# Altium PCB ch55x.PcbDoc
Units mm, origin at the board's own origin, x right, y up, seen from the top; angles counter-clockwise.
Board outline 57.3 x 19.67 mm, 2 copper layers (Top Layer, Bottom Layer); 10 components, 19 nets, 47 pads, 17 vias.
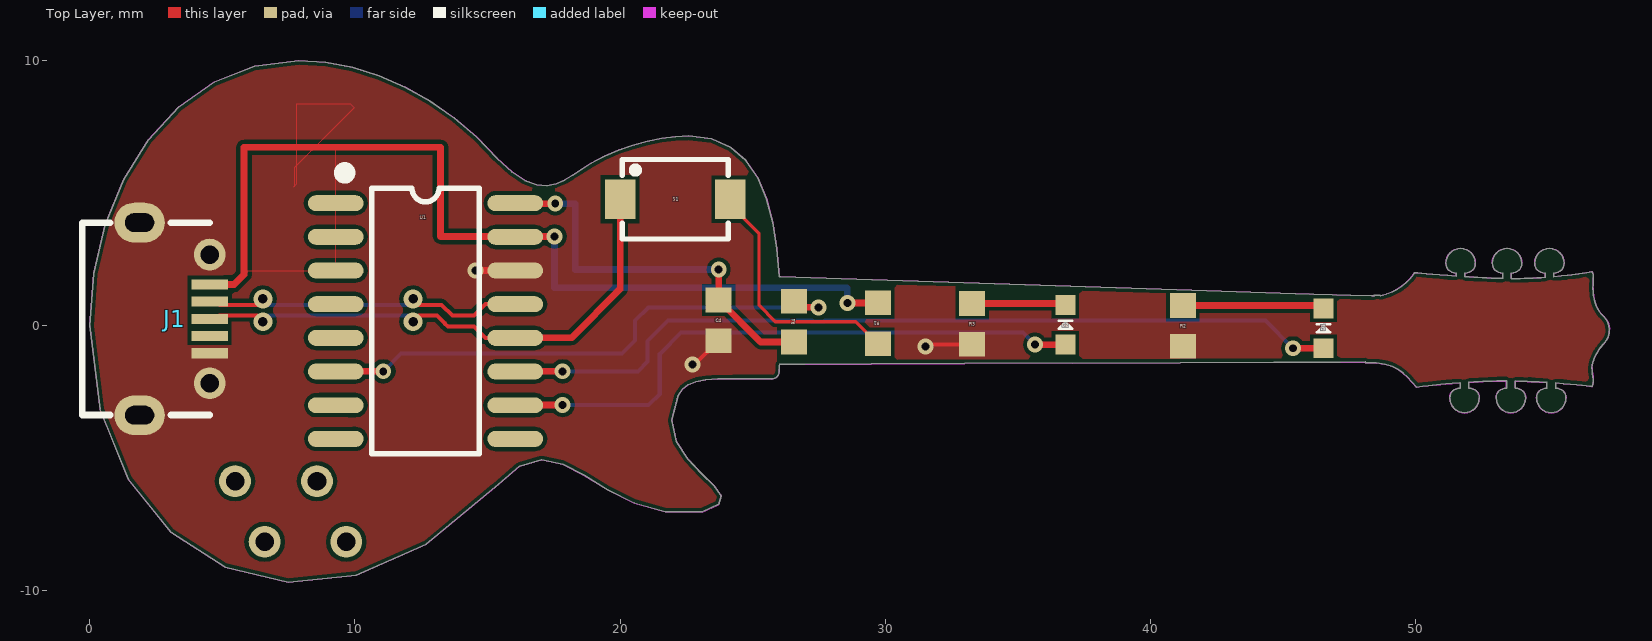
[diagram p0: Top Layer view]
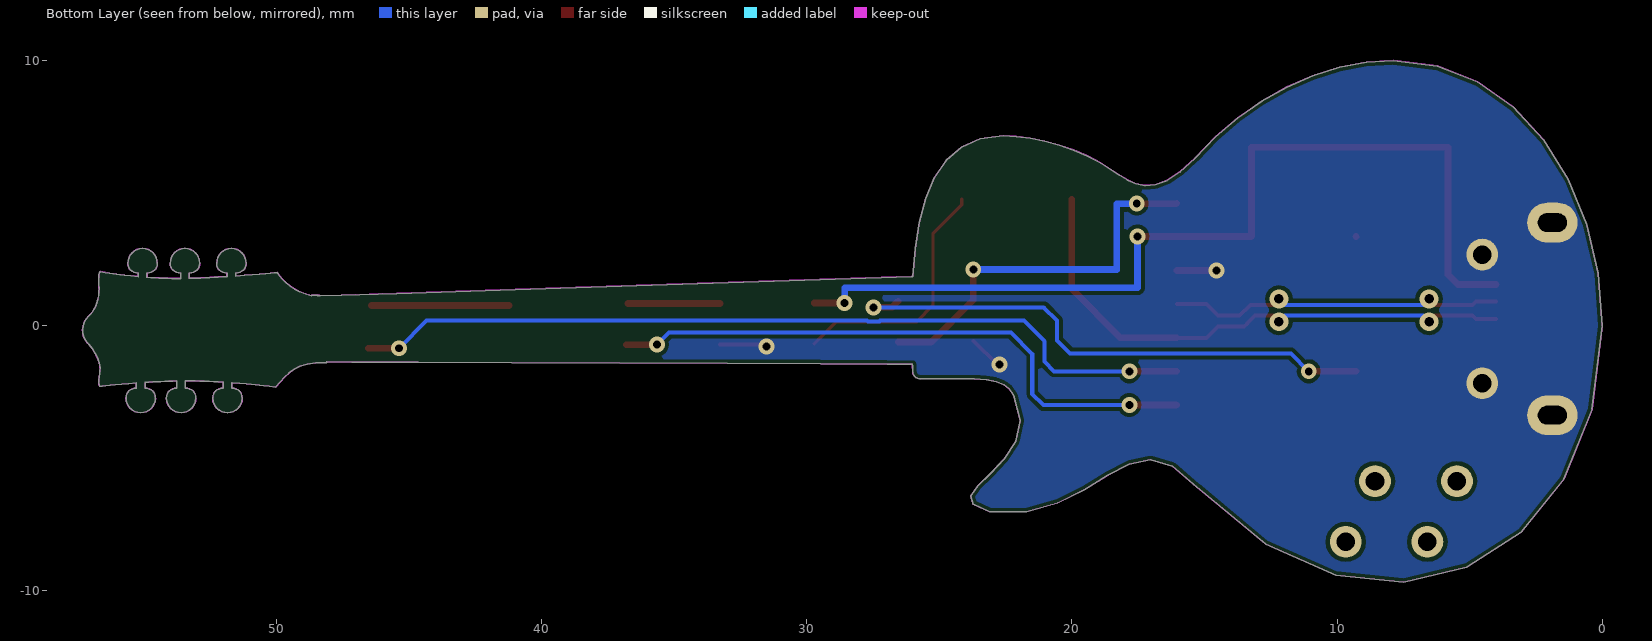
[diagram p1: Bottom Layer view, seen from below]
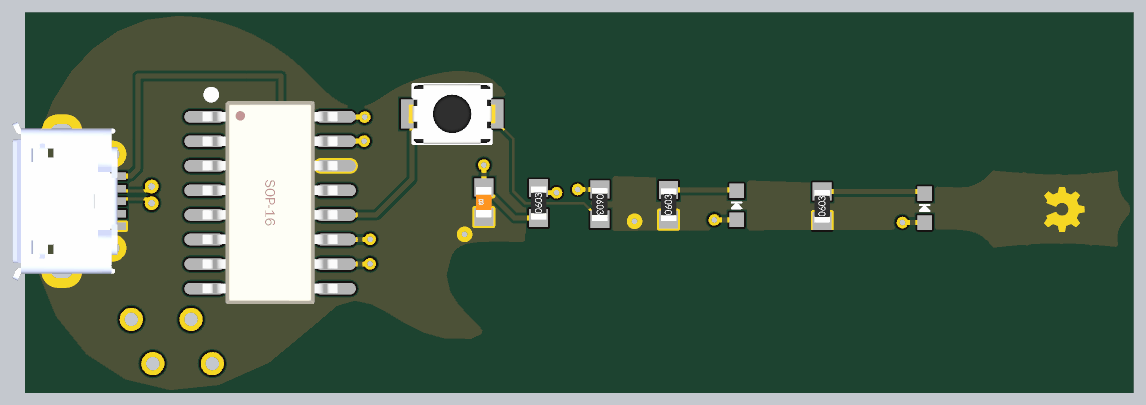
[diagram p2: 3D render of the assembled board from above, using the file's embedded part models]

## Layer stack, top to bottom
Top Solder: solder mask 0.0102, Solder Resist, Dk 3.5
Top Layer: signal copper 0.0356
Dielectric1: dielectric 0.32, FR-4, Dk 4.8
Bottom Layer: signal copper 0.0356
Bottom Solder: solder mask 0.0102, Solder Resist, Dk 3.5

## Board outline
920 vertices, not listed, extent 0.007,-9.676 57.306,9.999

## Design rules (kind name [scope] priority, off if disabled: settings)
Clearance [All] p1: gap=0.152 ignorepadtopadclearanceinfootprint=FALSE except(0: Arc-Hole Track-Hole SMDPad-Hole THPad-Hole Via-Hole Fill-Hole Poly-Hole Region-Hole Text-Hole)
ComponentClearance [All] p1 off: gap=0.254 collisioncheckmode=3 verticalgap=0.254 showdistances=FALSE
DiffPairsRouting [All] p1: maxlimit=0.254 minlimit=0.254 mostfreqgap=0.254 toplayer_minwidth=0.152 toplayer_maxwidth=0.381 toplayer_prefwidth=0.381 bottomlayer_minwidth=0.152 bottomlayer_maxwidth=0.381 bottomlayer_prefwidth=0.381 maxuncoupledlength=12.7
PolygonConnect [All] p1: connectstyle=Direct reliefconductorwidth=0.254 reliefentries=4 polygonreliefangle="90 Angle" airgapwidth=0.254
RoutingVias [All] p1: holewidth=0.356 width=0.711 viastyle="Through Hole" minholewidth=0.356 minwidth=0.711 maxholewidth=0.356 maxwidth=0.711
SolderMaskExpansion [All] p1: expansion=0.102
Width [All] p1: maxlimit=2.54 minlimit=0.127 preferedwidth=0.254 minimp=50.000000 maximp=50.000000 favimp=50.000000
28 further rules are at their usual default settings.

## Classes and differential pairs
differential pair USB: +USB_P -USB_N

## Components (designator, comment, footprint, x,y, rotation, side; value= is the part's Value field where it differs from the comment)
C4 "C0603" 0603_C 23.717,0.199 r90 top value=0.1uF
D1 "GREEN" 0603_LED 46.523,-0.1 r90 top
D2 "RED" 0603_LED 36.792,0.037 r90 top
J1 "Micro USB B" MICRO_USB 3.2,0.258 r90 top
R1 "R0603" 0603_R 29.719,0.09 r270 top value=1K
R2 "R0603" 0603_R 41.222,-0.006 r90 top value=1K
R3 "R0603" 0603_R 33.272,0.07 r90 top value=1K
R4 "R0603" 0603_R 26.551,0.156 r90 top value=100R
S1 "SW-PB" SMT_SW_PTS_820 22.076,4.769 r0 top
U1 "CH551G" SOP16N_M 12.66,0.176 r0 top locked

## Footprints (in the part's own frame and the unit in brackets; to place one, negate y for a bottom-side part, rotate by r counter-clockwise, add the part's x,y. Pads: shape width x height; smd on the part's side, far side on the other; paste and mask are expansions set on the pad)
0603_C [mm]
  rect 0.93x0.98 smd: 1(-0.77,0) 2(0.77,0)
  body extent -0.8,-0.4 0.8,0.4, height 0.3
0603_LED [mm]
  rect 0.75x0.75 smd: 1(-0.75,0) 2(0.75,0)
  silkscreen extent -0.15,-0.25 0.15,0.25
0603_R [mm]
  rect 0.93x0.98 smd: 1(-0.77,0) 2(0.77,0)
  body extent -0.85,-0.4 0.85,0.4, height 0.56
MICRO_USB [mil]
  rect 15x54 smd: 1(51,-52) 2(25.5,-52) 3(0,-52) 4(-25.5,-52) 5(-51,-52)
  oval 59.06x74.8 hole 27.56 slot 43.31 at 90 deg: 6(-143,52) 7(143,52)
  round 47.24 hole 27.5: 8(95.5,-52) 9(-95.5,-52)
  silkscreen extent -143,-52 143,137, body extent -161,-61 161,152, height 105
SMT_SW_PTS_820 [mm] "SMT Tactile ?Switch PTS 820 Series"
  rect 1.143x1.5 smd: 1(-2.075,0) 2(2.075,0)
  round 0 all layers, no hole paste-2.54 mask-2.54: MH1(0,0.9) MH2(0,-0.9)
  silkscreen extent -2,-1.5 2,1.5, body extent -2.25,-1.55 2.25,1.55, height 2.05
SOP16N_M [mm] "10.3*7*1.8mm（长宽高）"
  oval 2.1x0.6 smd: 1(-3.383,4.445) 2(-3.383,3.175) 3(-3.383,1.905) 4(-3.383,0.635) 5(-3.383,-0.635) 6(-3.383,-1.905) 7(-3.383,-3.175) 8(-3.383,-4.445) 9(3.383,-4.445) 10(3.383,-3.175) 11(3.383,-1.905) 12(3.383,-0.635) 13(3.383,0.635) 14(3.383,1.905) 15(3.383,3.175) 16(3.383,4.445)
  silkscreen extent -3.2,-5 2.03,5.74, body extent -3.5,-5.25 3.5,5.25, height 1.9

## Part data
C4: "Capacitor", LatestRevisionDate=17-Jul-2002, LatestRevisionNote="Re-released for DXP Platform.", PackageDescription="Radial Cap, Thru-Hole; 2 Leads; 0.3 in Pin Spacing", PackageReference=RAD-0.3, Published=8-Jun-2000, Publisher="Altium Limited"
D1 D2: library part D0603, "Typical RED, GREEN, YELLOW, AMBER GaAs LED", LatestRevisionDate=17-Jul-2002, LatestRevisionNote="Re-released for DXP Platform.", PackageDescription="SM LED; 2 Flat Leads", PackageReference=3.2X1.6X1.1, PackageVersion=Feb-2002, Published=8-Jun-2000, Publisher="Altium Limited"
R1 R2 R3 R4: "Resistor", LatestRevisionDate=17-Jul-2002, LatestRevisionNote="Re-released for DXP Platform.", PackageDescription="Axial Device, Thru-Hole; 2 Leads; 0.3 in Pin Spacing", PackageReference=AXIAL-0.3, Published=8-Jun-2000, Publisher="Altium Limited"
S1: "Switch", LatestRevisionDate=17-Jul-2002, LatestRevisionNote="Re-released for DXP Platform.", PackageDescription="Switch; 2 Leads", PackageReference=SPST-2, Published=24-Mar-1999, Publisher="Altium Limited"

## Free pads (board coordinates)
  round 1.2 hole 0.699: 2(5.477,-5.861) 2(6.592,-8.15) 2(8.568,-5.861) 2(9.67,-8.15)

## Via types
v1: diameter 0.6, hole 0.3, Top Layer to Bottom Layer, 13 vias
v2: diameter 0.711, hole 0.356, Top Layer to Bottom Layer, 4 vias

## Nets (pads, with @x,y where several pads share a name; then routed paths per layer and width w, separated by ;. In a path a pad name is that pad's centre, name@x,y a point inside that pad or via, vN(x,y) a via of type N, cw(c..) or ccw(c..) an arc to the next point about the centre after c; other vN are vias at no path point)
3V3: C4.2 R4.1 U1.16 | length 14.8
  Top Layer w0.254: U1.16 16.061,4.604 v1(17.552,4.604) ; v1(23.717,2.119) C4.2 25.3,-0.614 R4.1
  Bottom Layer w0.254: v1(17.552,4.604) 18.304,4.604 18.304,2.127 18.311,2.119 v1(23.717,2.119)
5V_USB: J1.1 R1.1 U1.15 | length 36.5
  Top Layer w0.254: J1.1@4.004,1.553 5.444,1.553 5.817,1.926 5.817,6.73 13.226,6.73 13.226,3.364 v1(17.521,3.364) ; v1(28.568,0.86) R1.1
  Bottom Layer w0.254: v1(17.521,3.364) 17.521,1.431 28.568,1.431 v1(28.568,0.86)
GND: C4.1 J1.5 J1.6 J1.7 J1.8 J1.9 R2.1 R3.1 U1.14 | length 4.6
  Top Layer w0.152: v1(22.723,-1.46) 22.812,-1.46 23.701,-0.571 C4.1 ; v1(31.516,-0.785) 31.601,-0.7 R3.1
  Top Layer w0.254: v1(14.552,2.081) U1.14
NetD1_2: D1.2 R2.2 | length 5.2
  Top Layer w0.254: R2.2 D1.2@46.409,0.764
NetD2_2: D2.2 R3.2 | length 3.5
  Top Layer w0.254: R3.2 D2.2@36.739,0.84
NetR1_2: R1.2 S1.2 | length 9.5
  Top Layer w0.127: S1.2 24.151,4.563 25.238,3.476 25.238,0.768 25.853,0.154 28.885,0.154 R1.2
NetR4_2: R4.2 U1.6 | length 20.6
  Top Layer w0.254: U1.6@9.287,-1.718 v1(11.067,-1.718) ; R4.2 26.785,0.692 v1(27.476,0.692)
  Bottom Layer w0.152: v1(11.067,-1.718) 11.74,-1.045 20.067,-1.045 20.561,-0.551 20.561,0.193 21.06,0.692 v1(27.476,0.692)
P1.1: U1.9
P1.4: U1.2 | length 0
  Top Layer w0.254: U1.2 U1.2@9.287,3.362
P1.5: U1.3
P1.6: U1.4
P1.7: U1.5
P3.0: U1.8
P3.1: U1.7
P3.2: U1.1
P3.3: D2.1 U1.10 | length 22.9
  Top Layer w0.254: U1.10@16.053,-2.988 v1(17.833,-2.988) ; v1(35.642,-0.713) D2.1
  Bottom Layer w0.152: v1(17.833,-2.988) 21.077,-2.988 21.494,-2.572 21.494,-1.059 22.297,-0.256 35.185,-0.256 v1(35.642,-0.713)
P3.4: D1.1 U1.11 | length 32.2
  Top Layer w0.254: U1.11@16.053,-1.718 v1(17.833,-1.718) ; v1(45.373,-0.85) D1.1
  Bottom Layer w0.152: v1(17.833,-1.718) 20.674,-1.718 21.037,-1.355 21.037,-0.586 21.81,0.188 27.232,0.188 27.257,0.163 27.695,0.163 27.719,0.188 44.335,0.188 v1(45.373,-0.85)
USB_N: J1.2 U1.13 | length 12.8
  Top Layer w0.152: J1.2@4.004,0.905 4.766,0.905 4.886,0.785 6.3,0.785 v2(6.528,1.013) ; v2(12.19,1.013) 12.419,0.785 13.268,0.785 13.673,0.38 14.485,0.38 14.917,0.811 U1.13
  Bottom Layer w0.152: v2(6.528,1.013) 6.757,0.785 11.961,0.785 v2(12.19,1.013)
USB_P: J1.3 S1.1 U1.12 | length 20.9
  Top Layer w0.152: J1.3@4.004,0.258 4.766,0.258 4.886,0.378 6.3,0.378 v2(6.528,0.15) ; v2(12.19,0.15) 12.419,0.378 13.099,0.378 13.377,0.1 ; 13.385,0.092 13.504,-0.027 14.485,-0.027 14.917,-0.459 U1.12
  Top Layer w0.254: U1.12 18.162,-0.459 20.001,1.381 S1.1
  Bottom Layer w0.152: v2(6.528,0.15) 6.757,0.378 11.961,0.378 v2(12.19,0.15)
pads on no net: J1.4 S1.MH1 S1.MH2

## Polygon pours and split planes (outlines as drawn)
GND on Top Layer "GND_L01_P012" (solid, remove dead copper, pour order 12): 5.817,6.73 5.817,1.926 5.972,2.081 9.277,2.081 9.277,6.679 9.246,6.711 9.258,6.723 9.284,6.723
GND on Top Layer "GND_L01_P010" (solid, remove dead copper, pour order 10): 5.037,7.61 5.037,1.224 15.466,-9.205 12.507,-12.164 -1.209,-12.164 -1.209,1.349 5.052,7.61
GND on Top Layer "GND_L01_P008" (solid, remove dead copper, pour order 8): -9.126,14.254 -8.832,14.559 62.107,14.559 62.107,9.275 62.107,2.323 62.206,-11.519 58.125,-11.519 -9.126,-11.519 -9.126,0.17
GND on Top Layer "GND_L01_P014" (solid, remove dead copper, pour order 14): 7.696,5.248 7.805,5.357 7.805,8.374 9.825,8.374 9.977,8.222 7.704,5.949 7.704,5.248
GND on Bottom Layer "GND_L02_P016" (solid, remove dead copper, pour order 16): -8.108,11.768 -7.813,12.073 63.125,12.073 63.125,6.789 63.125,-0.163 63.224,-14.006 59.144,-14.006 -8.108,-14.006 -8.108,-2.316

## Keep-outs
Keep-Out Layer:
  lines w0.013: 15.359,6.316 14.589,7.12 13.746,7.84 12.843,8.471 11.894,9.003 10.91,9.43 9.905,9.745 8.893,9.939 7.885,10.005 6.215,9.795 4.697,9.195 3.353,8.252 2.204,7.012 1.272,5.52 0.58,3.823 0.149,1.968 0,0 0.379,-3.157 1.437,-5.778 3.054,-7.789 5.108,-9.115 7.479,-9.683 10.048,-9.416 12.693,-8.242 15.294,-6.085 15.293,-6.084 16.208,-5.3 17.038,-5.063 17.833,-5.228 18.646,-5.651 19.528,-6.187 20.529,-6.692 21.702,-7.02 23.097,-7.027 23.717,-6.744 23.817,-6.42 23.553,-6.036 23.079,-5.575 22.551,-5.022 22.125,-4.358 21.955,-3.567 22.196,-2.631 22.355,-2.395 22.571,-2.225 22.855,-2.112 23.219,-2.044 23.676,-2.011 24.237,-2.002 24.914,-2.006 25.719,-2.011 25.775,-2.006 25.827,-1.991 25.874,-1.966 25.916,-1.933 25.951,-1.893 25.978,-1.847 25.996,-1.795 26.004,-1.74 26.006,-1.705 26.007,-1.67 26.009,-1.635 26.01,-1.599 26.011,-1.564 26.013,-1.529 26.014,-1.494 26.016,-1.459 26.965,-1.456 29.467,-1.446 33.003,-1.432 37.058,-1.416 41.112,-1.4 44.649,-1.386 47.15,-1.376 48.099,-1.372 48.099,-1.397 48.508,-1.41 48.84,-1.458 49.11,-1.538 49.332,-1.647 49.52,-1.784 49.688,-1.943 49.851,-2.124 50.023,-2.323 50.271,-2.292 50.468,-2.269 50.634,-2.25 50.788,-2.234 50.95,-2.219 51.138,-2.203 51.373,-2.184 51.672,-2.161 51.673,-2.346 51.591,-2.36 51.516,-2.383 51.449,-2.413 51.391,-2.453 51.345,-2.504 51.31,-2.565 51.288,-2.639 51.28,-2.727 51.292,-2.839 51.324,-2.945 51.376,-3.04 51.444,-3.123 51.527,-3.191 51.622,-3.243 51.728,-3.275 51.841,-3.287 51.954,-3.275 52.059,-3.243 52.154,-3.191 52.237,-3.123 52.305,-3.04 52.357,-2.945 52.39,-2.839 52.401,-2.727 52.394,-2.639 52.372,-2.565 52.337,-2.504 52.29,-2.453 52.233,-2.413 52.166,-2.383 52.091,-2.36 52.009,-2.346 52.009,-2.137 52.184,-2.126 52.361,-2.116 52.538,-2.107 52.715,-2.099 52.89,-2.093 53.063,-2.089 53.233,-2.086 53.399,-2.086 53.402,-2.086 53.405,-2.086 53.408,-2.086 53.411,-2.086 53.413,-2.086 53.416,-2.086 53.419,-2.086 53.422,-2.086 53.422,-2.346 53.34,-2.36 53.265,-2.383 53.198,-2.413 53.141,-2.453 53.094,-2.504 53.06,-2.566 53.038,-2.639 53.03,-2.727 53.042,-2.839 53.074,-2.945 53.126,-3.04 53.194,-3.123 53.277,-3.191 53.372,-3.243 53.477,-3.275 53.59,-3.287 53.703,-3.275 53.808,-3.243 53.903,-3.191 53.986,-3.123 54.055,-3.04 54.106,-2.945 54.139,-2.839 54.15,-2.727 54.143,-2.639 54.121,-2.565 54.086,-2.504 54.039,-2.453 53.982,-2.413 53.915,-2.383 53.84,-2.36 53.758,-2.346 53.758,-2.091 53.911,-2.094 54.063,-2.099 54.215,-2.105 54.364,-2.111 54.513,-2.118 54.659,-2.126 54.803,-2.134 54.944,-2.143 54.944,-2.346 54.862,-2.36 54.787,-2.383 54.72,-2.413 54.663,-2.453 54.616,-2.504 54.582,-2.566 54.56,-2.639 54.552,-2.727 54.564,-2.839 54.596,-2.945 54.648,-3.04 54.716,-3.123 54.799,-3.191 54.894,-3.243 55,-3.275 55.112,-3.287 55.225,-3.275 55.33,-3.243 55.426,-3.191 55.509,-3.122 55.577,-3.039 55.629,-2.944 55.661,-2.839 55.673,-2.726 55.665,-2.639 55.643,-2.565 55.608,-2.504 55.562,-2.453 55.504,-2.413 55.437,-2.383 55.362,-2.36 55.281,-2.346 55.281,-2.167 55.569,-2.189 55.833,-2.212 56.067,-2.234 56.269,-2.254 56.434,-2.271 56.556,-2.284 56.633,-2.293 56.659,-2.296 56.692,-2.224 56.703,-2.137 56.699,-2.037 56.686,-1.928 56.67,-1.815 56.657,-1.7 56.653,-1.587 56.664,-1.48 56.699,-1.346 56.746,-1.218 56.802,-1.099 56.864,-0.989 56.93,-0.888 56.997,-0.798 57.061,-0.72 57.12,-0.654 57.21,-0.537 57.271,-0.409 57.305,-0.275 57.313,-0.138 57.295,-0.003 57.252,0.125 57.185,0.244 57.095,0.347 57.034,0.408 56.975,0.477 56.918,0.555 56.866,0.643 56.818,0.743 56.775,0.857 56.74,0.985 56.711,1.13 56.696,1.275 56.692,1.421 56.695,1.562 56.7,1.695 56.702,1.815 56.697,1.917 56.679,1.996 56.643,2.047 56.448,2.01 56.291,1.981 56.156,1.958 56.025,1.939 55.882,1.922 55.709,1.903 55.491,1.882 55.211,1.856 55.211,1.98 55.293,1.994 55.367,2.016 55.434,2.047 55.492,2.087 55.538,2.138 55.573,2.199 55.595,2.273 55.603,2.36 55.591,2.473 55.559,2.578 55.507,2.673 55.438,2.756 55.355,2.825 55.26,2.876 55.155,2.909 55.042,2.92 54.929,2.909 54.824,2.876 54.729,2.825 54.646,2.756 54.578,2.673 54.526,2.578 54.494,2.473 54.482,2.36 54.49,2.273 54.511,2.199 54.546,2.138 54.593,2.087 54.65,2.047 54.717,2.017 54.792,1.994 54.874,1.98 54.874,1.828 54.726,1.818 54.575,1.808 54.421,1.8 54.264,1.793 54.104,1.788 53.942,1.784 53.778,1.782 53.612,1.782 53.612,1.98 53.694,1.994 53.769,2.016 53.836,2.047 53.893,2.087 53.94,2.138 53.975,2.199 53.997,2.273 54.005,2.36 53.993,2.473 53.961,2.578 53.909,2.673 53.84,2.756 53.757,2.825 53.662,2.876 53.557,2.909 53.444,2.92 53.331,2.909 53.226,2.876 53.131,2.825 53.048,2.756 52.98,2.673 52.928,2.578 52.895,2.473 52.883,2.36 52.891,2.273 52.913,2.199 52.948,2.138 52.995,2.087 53.052,2.047 53.119,2.016 53.194,1.994 53.276,1.98 53.276,1.787 53.265,1.787 53.254,1.787 53.243,1.788 53.233,1.788 53.222,1.788 53.211,1.788 53.2,1.789 53.189,1.789 53.019,1.795 52.85,1.802 52.681,1.81 52.513,1.819 52.347,1.827 52.183,1.837 52.021,1.846 51.862,1.856 51.862,1.98 51.944,1.994 52.019,2.017 52.085,2.047 52.143,2.087 52.189,2.138 52.224,2.199 52.246,2.273 52.254,2.36 52.242,2.473 52.21,2.578 52.158,2.673 52.09,2.756 52.007,2.825 51.911,2.876 51.806,2.909 51.694,2.92 51.581,2.909 51.475,2.876 51.38,2.825 51.297,2.756 51.229,2.673 51.177,2.578 51.145,2.473 51.133,2.36 51.141,2.273 51.163,2.199 51.197,2.138 51.244,2.087 51.302,2.047 51.368,2.016 51.443,1.994 51.525,1.98 51.525,1.879 51.2,1.902 50.902,1.925 50.635,1.947 50.406,1.967 50.219,1.983 50.079,1.996 49.991,2.005 49.96,2.008 49.873,1.878 49.762,1.748 49.631,1.621 49.478,1.5 49.306,1.388 49.114,1.288 48.903,1.203 48.675,1.136 48.675,1.155 48.363,1.147 48.44,1.132 48.35,1.128 47.542,1.152 45.461,1.22 41.554,1.349 35.267,1.556 26.046,1.859 26.046,1.861 26.003,1.861 25.913,2.911 25.757,3.897 25.521,4.796 25.188,5.585 24.743,6.239 24.171,6.736 23.457,7.052 22.584,7.162 22.088,7.139 21.563,7.073 21.02,6.964 20.472,6.814 19.93,6.626 19.407,6.401 18.915,6.141 18.464,5.848 18.189,5.671 17.9,5.498 17.587,5.36 17.242,5.29 16.855,5.319 16.419,5.478 15.924,5.8 15.36,6.316 ; 15.359,6.316 15.36,6.316 ; 15.36,6.316 15.36,6.316 ; 15.36,6.316 15.36,6.316 ; 15.36,6.316 15.36,6.316 ; 15.36,6.316 15.36,6.316 ; 15.36,6.316 15.36,6.316 ; 15.36,6.316 15.36,6.316 ; 15.36,6.316 15.36,6.316

## Silkscreen, mask and mechanical layers (free items; w line width, h text height)
Top Solder:
  region: 54.79,-0.319 54.781,-0.323 54.781,-0.322 54.502,-0.376 54.494,-0.379 54.491,-0.385 54.395,-0.619 54.392,-0.624 54.396,-0.633 54.555,-0.868 54.559,-0.876 54.554,-0.888 54.553,-0.887 54.353,-1.088 54.342,-1.093 54.333,-1.09 54.333,-1.089 54.098,-0.93 54.09,-0.927 54.084,-0.929 53.851,-1.026 53.845,-1.028 53.841,-1.037 53.842,-1.037 53.788,-1.315 53.785,-1.324 53.773,-1.329 53.773,-1.327 53.489,-1.329 53.478,-1.324 53.474,-1.315 53.421,-1.037 53.417,-1.028 53.412,-1.026 53.178,-0.929 53.173,-0.927 53.164,-0.93 52.929,-1.09 52.921,-1.093 52.909,-1.088 52.91,-1.088 52.708,-0.888 52.704,-0.876 52.707,-0.868 52.867,-0.633 52.87,-0.624 52.868,-0.619 52.824,-0.512 52.821,-0.506 52.826,-0.494 52.832,-0.492 53.314,-0.295 53.319,-0.293 53.331,-0.298 53.333,-0.303 53.329,-0.305 53.395,-0.402 53.503,-0.475 53.631,-0.5 53.759,-0.475 53.868,-0.402 53.94,-0.294 53.966,-0.166 53.94,-0.038 53.868,0.071 53.759,0.144 53.631,0.169 53.503,0.144 53.395,0.071 53.329,-0.027 53.333,-0.028 53.331,-0.034 53.319,-0.038 53.314,-0.036 52.832,0.161 52.826,0.163 52.821,0.175 52.824,0.18 52.868,0.287 52.87,0.293 52.867,0.302 52.866,0.301 52.707,0.536 52.704,0.545 52.708,0.556 52.709,0.556 52.909,0.757 52.921,0.762 52.929,0.759 52.929,0.758 53.164,0.599 53.173,0.595 53.178,0.598 53.412,0.694 53.417,0.697 53.421,0.705 53.474,0.984 53.478,0.993 53.489,0.998 53.489,0.996 53.773,0.998 53.785,0.993 53.788,0.984 53.841,0.705 53.845,0.697 53.851,0.694 54.084,0.598 54.09,0.595 54.098,0.599 54.333,0.759 54.342,0.762 54.353,0.757 54.352,0.756 54.554,0.556 54.559,0.545 54.555,0.536 54.555,0.537 54.396,0.302 54.392,0.293 54.395,0.287 54.491,0.054 54.494,0.048 54.502,0.045 54.781,-0.009 54.79,-0.012 54.794,-0.024 54.793,-0.024 54.794,-0.308